# Altium PCB PCB_ECU_Standelone-V1.0_2024-03-04.pcbdoc (part 1 of 2)
Units mm, origin at the board's own origin, x right, y up, seen from the top; angles counter-clockwise.
Board outline 181.85 x 171.52 mm, 2 copper layers (Top Layer, Bottom Layer); 165 components, 147 nets, 580 pads, 706 vias.
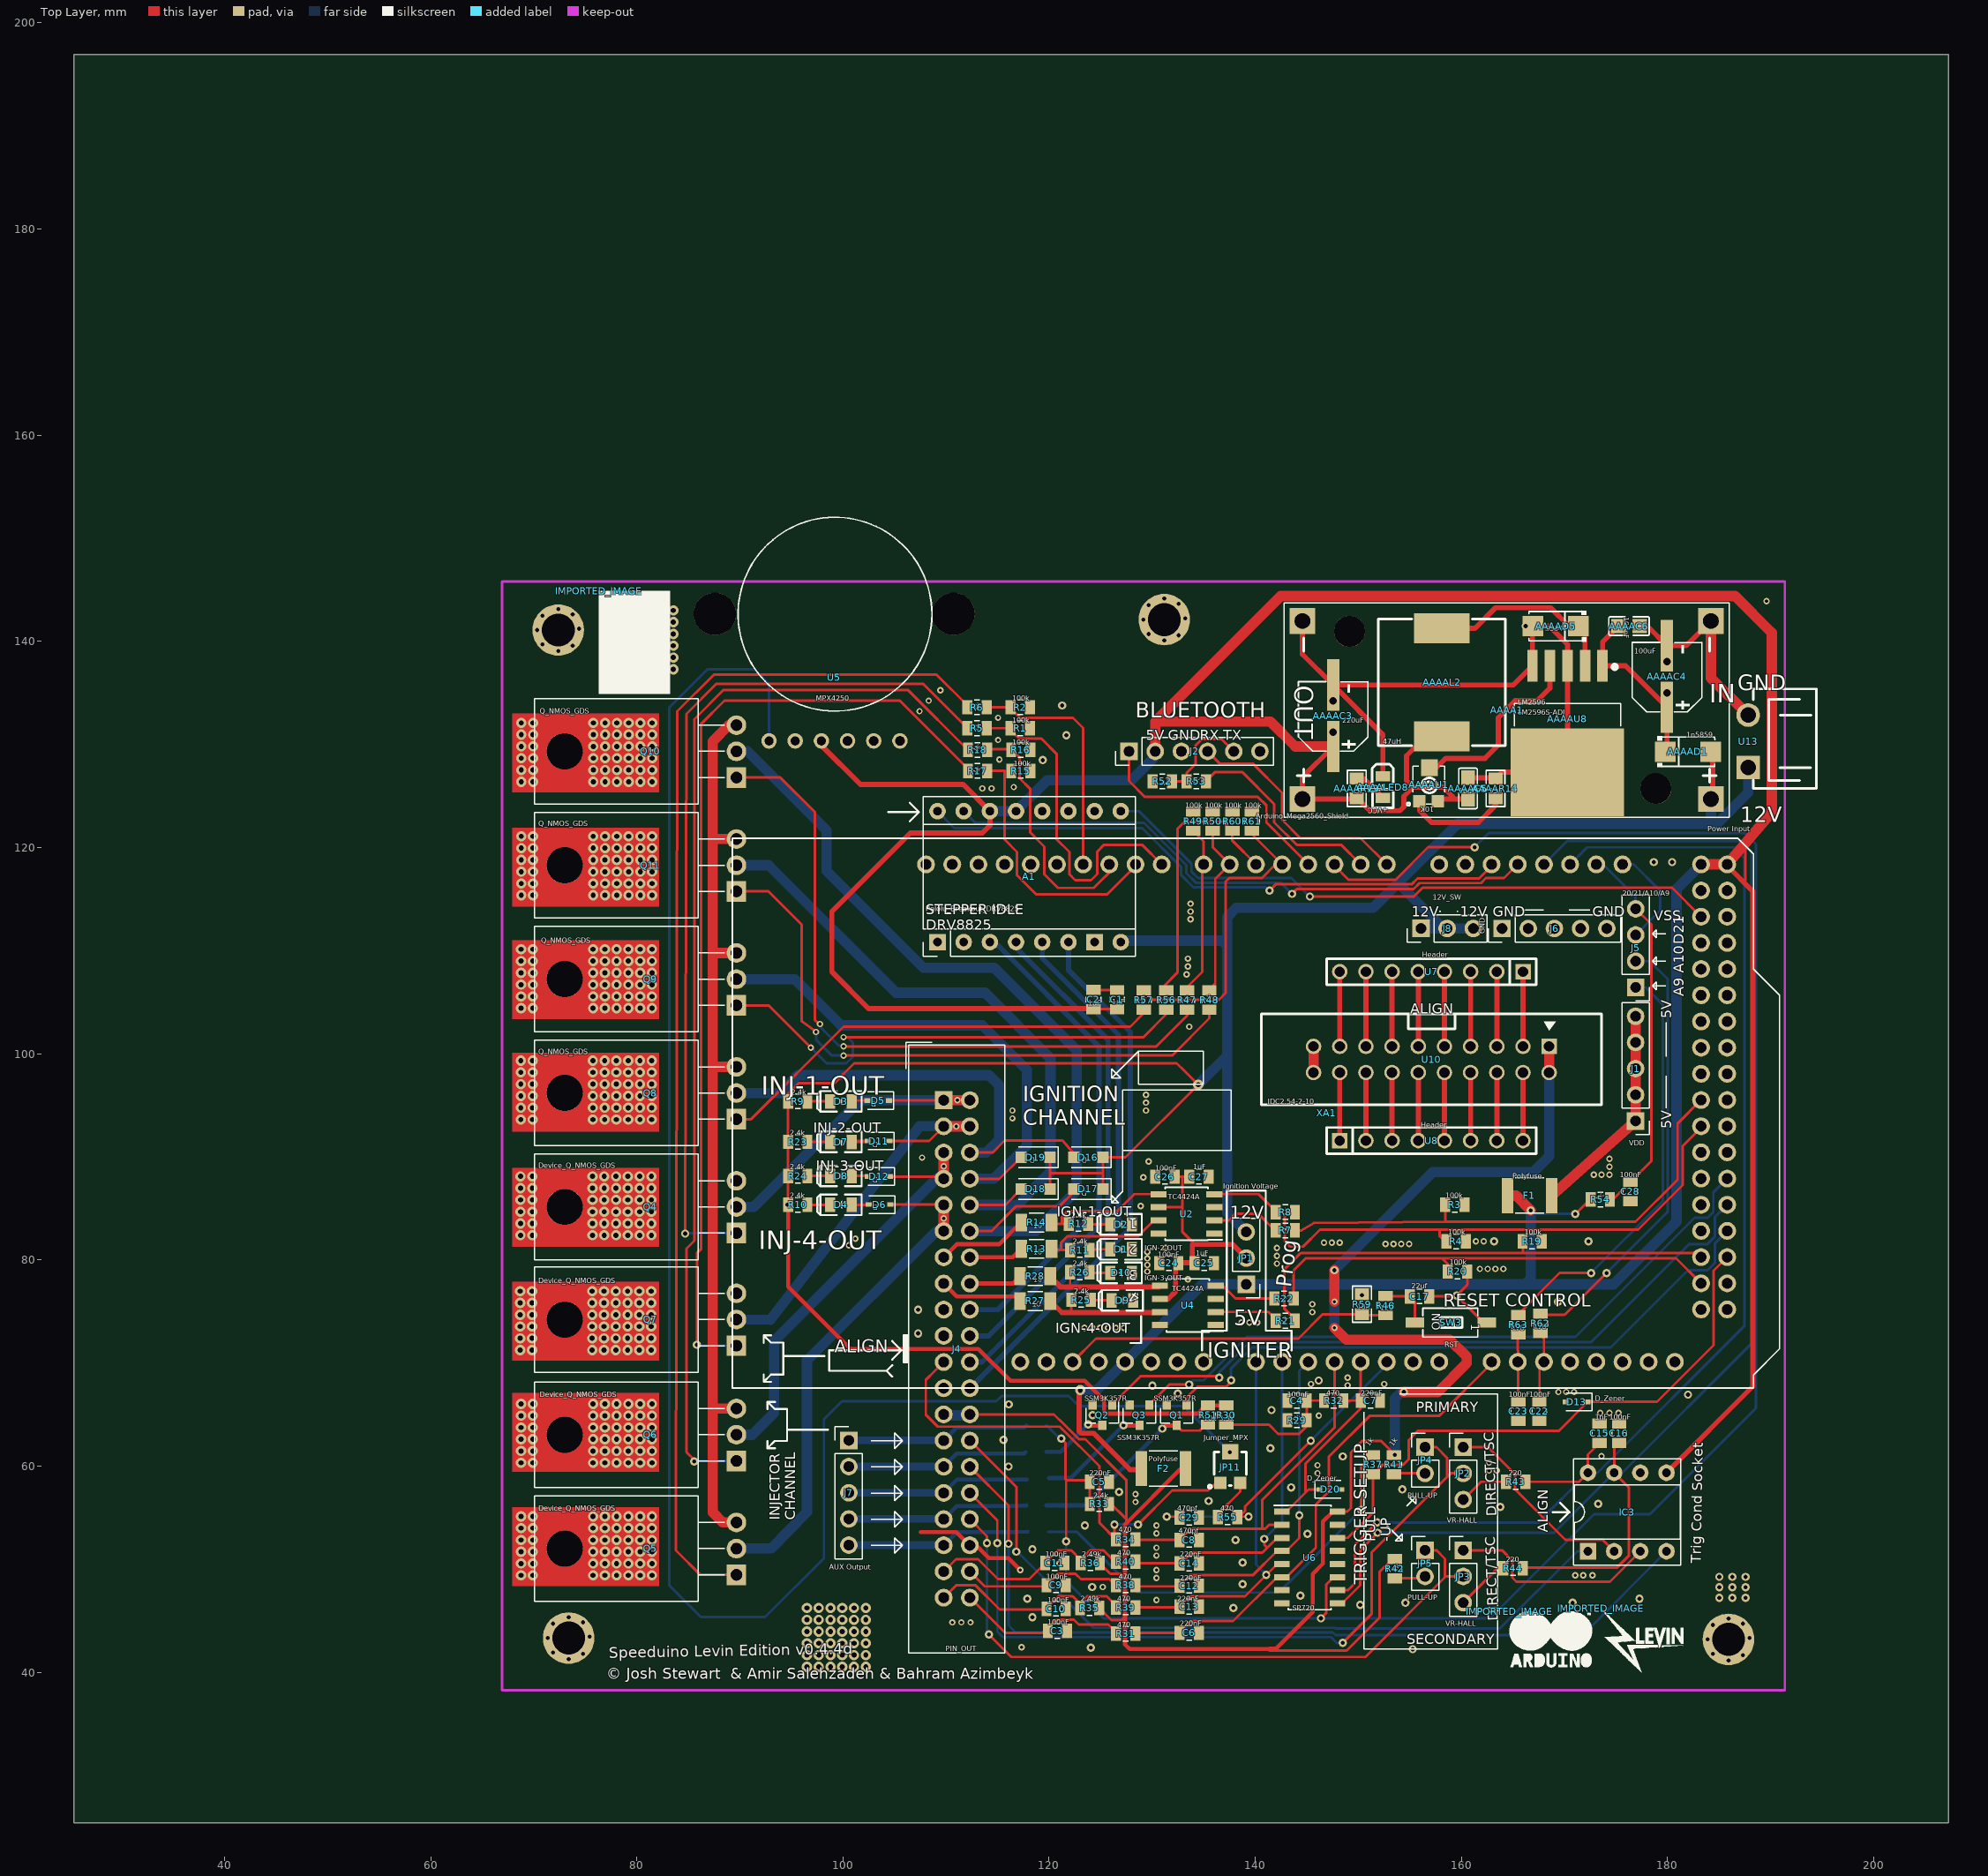
[diagram p0: Top Layer view]
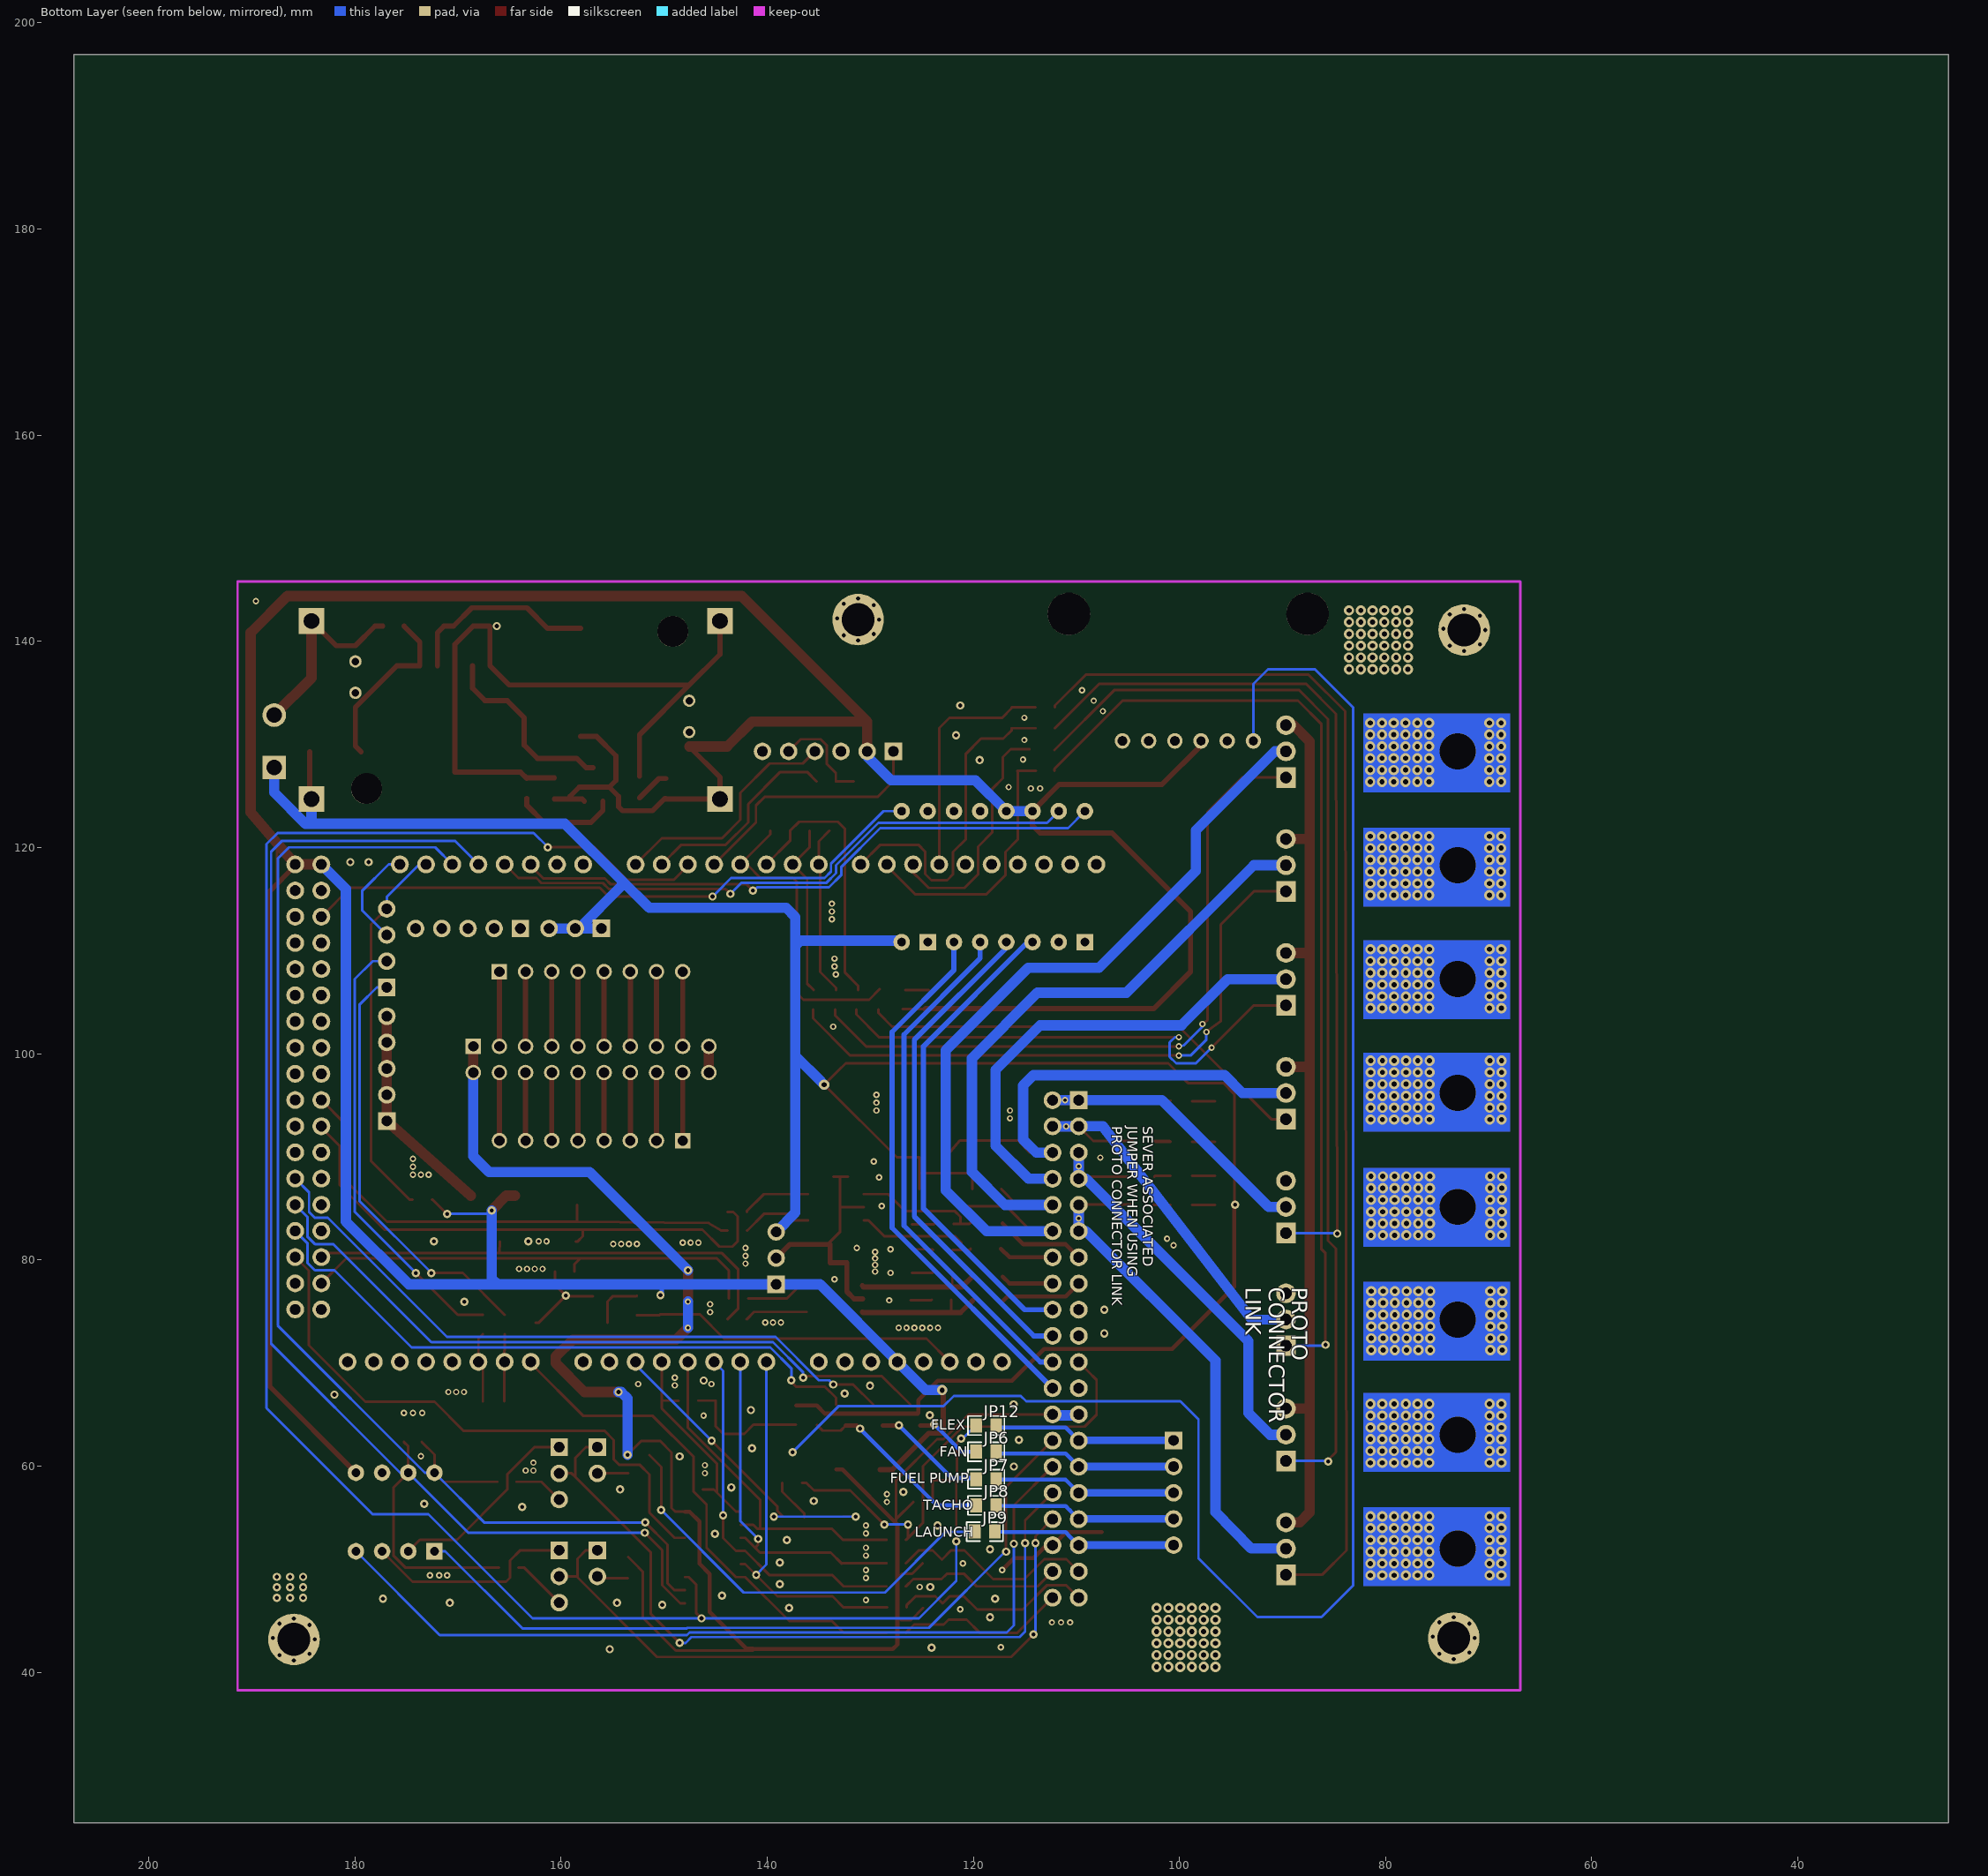
[diagram p1: Bottom Layer view, seen from below]

## Layer stack, top to bottom
Top Layer: signal copper (thickness not stored)
Dielectric: dielectric 0.32, FR-4, Dk 4.8
Bottom Layer: signal copper (thickness not stored)

## Board outline
207.251,25.4 25.4,25.4 25.4,196.925 207.251,196.925

## Components (designator, comment, footprint, x,y, rotation, side; value= is the part's Value field where it differs from the comment)
A1 "Pololu_Breakout_DRV8825" POLOLU_BREAKOUT-16_15.2X20.3MM -20.723,175.227 r0 top
AAAA1 "LM2596" DC-DC-STEP-DOWN-LM2596 164.58,132.969 r180 top
AAAAC3 "220uF" "CAP SMD 6.3 ~ 8 DIP 25V" 147.562,132.715 r90 top
AAAAC4 "100uF" "CAP SMD 6.3 ~ 8 DIP 25V" 179.947,136.525 r90 top
AAAAC5 "100nF" C0805 160.643,125.73 r270 top
AAAAC6 "100nF" C0805 176.264,141.478 r180 top
AAAAD1 "1n5859" SMA_L4.3-W2.6-LS5.1-RD 181.979,129.286 r0 top
AAAAD5 "SS34" SMA_L4.3-W2.6-LS5.1-RD 169.152,141.478 r180 top
AAAAL2 "47uH" IND-SMD_L12.3-W12.3_SMDRI127 158.103,136.017 r270 top
AAAALED8 "+VCC" LED0805-R-RD 152.386,125.858 r270 top
AAAAR13 "1K" R0805 149.848,125.73 r270 top
AAAAR14 "330" R0805 163.31,125.73 r270 top
AAAAU1 "10K" RES-ADJ-SMD_SMD33-10K 156.833,126.111 r0 top
AAAAU8 "LM2596S-ADJ" TO-263-5_L10.2-W8.9-P1.70-BR 170.295,132.461 r90 top
C1 "1nF" C_0805_2012METRIC 126.596,105.237 r270 top
C2 "1uF" C_0805_2012METRIC 124.311,105.238 r270 top
C3 "100nF" C_0805_2012METRIC 120.815,43.993 r0 top
C4 "100nF" C_0805_2012METRIC 144.056,66.345 r180 top
C5 "220nF" C_0805_2012METRIC 124.879,58.471 r0 top
C6 "220nF" C_0805_2012METRIC 133.591,43.815 r0 top
C7 "220nF" C_0805_2012METRIC 151.168,66.345 r0 top
C8 "470pf" C_0805_2012METRIC 133.592,52.832 r180 top
C9 "100nF" C_0805_2012METRIC 120.688,48.438 r0 top
C10 "100nF" C_0805_2012METRIC 120.688,46.152 r0 top
C11 "100nF" C_0805_2012METRIC 120.561,50.597 r0 top
C12 "220nF" C_0805_2012METRIC 133.591,48.387 r0 top
C13 "220nF" C_0805_2012METRIC 133.591,46.355 r0 top
C14 "220nF" C_0805_2012METRIC 133.591,50.546 r0 top
C15 "1nF" C_0805_2012METRIC 173.393,63.17 r270 top
C16 "100nF" C_0805_2012METRIC 175.298,63.17 r270 top
C17 "22uf" C_0805_2012METRIC 155.944,76.454 r180 top
C22 "100nF" C_0805_2012METRIC 167.551,65.329 r270 top
C23 "100nF" C_0805_2012METRIC 165.519,65.329 r270 top
C24 "100nF" C_0805_2012METRIC 131.61,79.68 r0 top
C25 "1uF" C_0805_2012METRIC 135.039,79.68 r180 top
C26 "100nF" C_0805_2012METRIC 131.229,88.062 r0 top
C27 "1uF" C_0805_2012METRIC 134.531,88.062 r180 top
C28 "100nF" C_0805_2012METRIC 176.39,86.614 r90 top
C29 "470pf" C_0805_2012METRIC 133.592,54.991 r0 top
D1 "IGN-2-OUT" LED0805_RED 126.989,81.025 r180 top
D2 "IGN-1-OUT" LED0805_RED 126.989,83.438 r180 top
D3 "INJ-1-OUT" LED0805_RED 99.811,95.376 r180 top
D4 "INJ-4-OUT" LED0805_RED 99.811,85.343 r180 top
D5 "D" D_SOD-323#1 -20.774,189.146 r0 top
D6 "D" D_SOD-323#2 -20.647,186.86 r0 top
D7 "INJ-2-OUT" LED0805_RED 99.811,91.439 r180 top
D8 "INJ-3-OUT" LED0805_RED 99.811,88.137 r180 top
D9 "IGN-4-OUT" LED0805_RED 127.116,76.072 r180 top
D10 "IGN-3-OUT" LED0805_RED 126.989,78.739 r180 top
D11 "D" D_SOD-323#3 -20.723,175.227 r0 top
D12 "D" D_SOD-323#4 -20.713,179.578 r0 top
D13 "D_Zener" D_SOD-323#5 -20.723,175.227 r0 top
D16 "D" D_SOD-123F#1 -20.459,169.545 r0 top
D17 "D" D_SOD-123F#2 -20.459,169.418 r0 top
D18 "D" D_SOD-123F#3 -20.713,169.418 r0 top
D19 "D" D_SOD-123F#4 -20.713,169.545 r0 top
D20 "D_Zener" D_SOD-323#6 -20.723,175.227 r0 top
F1 "Polyfuse" FUSE_1812_4532METRIC 166.612,86.233 r0 top
F2 "Polyfuse" FUSE_1812_4532METRIC 131.102,59.741 r0 top
IC3 "Trig Cond Socket" DIP-8_W7.62MM_SOCKET -20.723,175.227 r0 top
IMPORTED_IMAGE "IMPORTED_IMAGE" IMPORTED_IMAGE 76.322,144.902 r0 top
IMPORTED_IMAGE "IMPORTED_IMAGE" IMPORTED_IMAGE 164.678,45.891 r0 top
IMPORTED_IMAGE "IMPORTED_IMAGE" IMPORTED_IMAGE 173.536,46.2 r0 top
J1 "VDD" PINHEADER_1X05_P2.54MM_VERTICAL#1 138.291,77.216 r180 top
J2 "Conn_01x06" PINHEADER_1X06_P2.54MM_VERTICAL -20.723,175.227 r0 top
J4 "PIN_OUT" IDC-HEADER_2X20_P2.54MM_VERTICAL -20.724,175.227 r0 top
J5 "20/21/A10/A9" PINHEADER_1X04_P2.54MM_VERTICAL -21.348,175.133 r0 top
J6 "GND" PINHEADER_1X05_P2.54MM_VERTICAL#2 168.009,112.649 r90 top
J7 "AUX Output" PINHEADER_1X05_P2.54MM_VERTICAL#3 -20.84,175.26 r0 top
J8 "12V_SW" PINHEADER_1X03_P2.54MM_VERTICAL#1 -21.856,173.228 r0 top
JP1 "Ignition Voltage" PINHEADER_1X03_P2.54MM_VERTICAL#2 -20.723,175.227 r0 top
JP2 "VR-HALL" PINHEADER_1X03_P2.54MM_VERTICAL#3 -20.723,175.227 r0 top
JP3 "VR-HALL" PINHEADER_1X03_P2.54MM_VERTICAL#4 -20.723,175.227 r0 top
JP4 "PULL-UP" PINHEADER_1X02_P2.54MM_VERTICAL#1 -20.723,175.227 r0 top
JP5 "PULL-UP" PINHEADER_1X02_P2.54MM_VERTICAL#2 -20.723,175.227 r0 top
JP6 "FAN-OUT" "JUMPER 2X1 (PIN= 2.54) SMD(0805)" 118.733,61.468 r0 bottom
JP7 "FUELPUMP-OUT" "JUMPER 2X1 (PIN= 2.54) SMD(0805)" 118.733,58.801 r0 bottom
JP8 "TACHO-OUT" "JUMPER 2X1 (PIN= 2.54) SMD(0805)" 118.733,56.261 r0 bottom
JP9 "Clutch_in" "JUMPER 2X1 (PIN= 2.54) SMD(0805)" 118.86,53.721 r0 bottom
JP11 "Jumper_MPX" RES-ADJ-SMD_3P-10K-3-3 137.579,59.867 r0 top
JP12 "MCU-D2" "JUMPER 2X1 (PIN= 2.54) SMD(0805)" 118.733,64.008 r0 bottom
Q1 "SSM3K357R" SOT-23#1 -20.723,175.227 r0 top
Q2 "SSM3K357R" SOT-23#2 -20.723,175.227 r0 top
Q3 "SSM3K357R" SOT-23#3 -20.723,175.227 r0 top
Q4 "Device_Q_NMOS_GDS" TO-220_Q_NMOS_GDS 81.395,85.09 r90 top
Q5 "Device_Q_NMOS_GDS" TO-220_Q_NMOS_GDS 81.395,51.943 r90 top
Q6 "Device_Q_NMOS_GDS" TO-220_Q_NMOS_GDS 81.395,62.992 r90 top
Q7 "Device_Q_NMOS_GDS" TO-220_Q_NMOS_GDS 81.395,74.168 r90 top
Q8 "Q_NMOS_GDS" TO-220_Q_NMOS_GDS 81.395,96.139 r90 top
Q9 "Q_NMOS_GDS" TO-220_Q_NMOS_GDS 81.395,107.188 r90 top
Q10 "Q_NMOS_GDS" TO-220_Q_NMOS_GDS 81.395,129.286 r90 top
Q11 "Q_NMOS_GDS" TO-220_Q_NMOS_GDS 81.395,118.237 r90 top
R1 "100k" R_0805_2012METRIC 117.209,131.572 r0 top
R2 "100k" R_0805_2012METRIC 117.209,133.604 r180 top
R3 "100k" R_0805_2012METRIC 159.373,85.344 r0 top
R4 "100k" R_0805_2012METRIC 159.5,81.788 r180 top
R5 "1k" R_0805_2012METRIC 113.018,131.572 r0 top
R6 "1k" R_0805_2012METRIC 113.018,133.604 r0 top
R7 "1k" R_0805_2012METRIC 142.913,82.855 r0 top
R8 "1k" R_0805_2012METRIC 142.913,84.633 r0 top
R9 "2.4k" R_0805_2012METRIC 95.619,95.377 r180 top
R10 "2.4k" R_0805_2012METRIC 95.619,85.344 r180 top
R11 "2.4k" R_0805_2012METRIC 122.974,80.95 r0 top
R12 "2.4k" R_0805_2012METRIC 122.847,83.49 r0 top
R13 "10" R_1206_3216METRIC 118.784,81.077 r0 top
R14 "10" R_1206_3216METRIC 118.784,83.617 r0 top
R15 "100k" R_0805_2012METRIC 117.259,127.432 r0 top
R16 "100k" R_0805_2012METRIC 117.259,129.464 r180 top
R17 "1k" R_0805_2012METRIC 113.068,127.432 r0 top
R18 "1k" R_0805_2012METRIC 113.068,129.464 r0 top
R19 "100k" R_0805_2012METRIC 166.866,81.788 r0 top
R20 "100k" R_0805_2012METRIC 159.627,78.867 r180 top
R21 "1k" R_0805_2012METRIC 142.913,74.092 r0 top
R22 "1k" R_0805_2012METRIC 142.786,76.251 r0 top
R23 "2.4k" R_0805_2012METRIC 95.619,91.44 r180 top
R24 "2.4k" R_0805_2012METRIC 95.619,88.138 r180 top
R25 "2.4k" R_0805_2012METRIC 123.101,76.124 r0 top
R26 "2.4k" R_0805_2012METRIC 122.974,78.791 r0 top
R27 "10" R_1206_3216METRIC 118.657,75.997 r0 top
R28 "10" R_1206_3216METRIC 118.657,78.41 r0 top
R29 "1k" R_0805_2012METRIC 144.056,64.44 r0 top
R30 "3.9k" R_0805_2012METRIC 137.198,64.948 r90 top
R31 "470" R_0805_2012METRIC 127.42,43.739 r180 top
R32 "470" R_0805_2012METRIC 147.613,66.345 r180 top
R33 "2.4k" R_0805_2012METRIC 124.879,56.312 r180 top
R34 "470" R_0805_2012METRIC 127.42,52.883 r180 top
R35 "2.49k" R_0805_2012METRIC 123.94,46.228 r0 top
R36 "2.49k" R_0805_2012METRIC 123.99,50.597 r0 top
R37 "1k" R_0805_2012METRIC 151.422,60.122 r270 top
R38 "470" R_0805_2012METRIC 127.42,48.438 r180 top
R39 "470" R_0805_2012METRIC 127.42,46.279 r180 top
R40 "470" R_0805_2012METRIC 127.42,50.724 r180 top
R41 "1k" R_0805_2012METRIC 153.454,60.122 r90 top
R42 "1k" R_0805_2012METRIC 153.531,50.038 r90 top
R43 "220" R_0805_2012METRIC 165.266,58.471 r180 top
R44 "220" R_0805_2012METRIC 165.012,50.089 r180 top
R46 "120" R_0805_2012METRIC 152.642,75.566 r90 top
R47 "1k" R_0805_2012METRIC 133.388,105.207 r90 top
R48 "1k" R_0805_2012METRIC 135.547,105.207 r90 top
R49 "100k" R_0805_2012METRIC 133.973,122.555 r90 top
R50 "100k" R_0805_2012METRIC 135.878,122.555 r270 top
R51 "10k" R_0805_2012METRIC 135.42,64.948 r90 top
R52 "2k" R_0805_2012METRIC 130.975,126.416 r180 top
R53 "1k" R_0805_2012METRIC 134.277,126.416 r180 top
R54 "1k" R_0805_2012METRIC 173.47,85.852 r180 top
R55 "470" R_0805_2012METRIC 137.326,55.042 r180 top
R56 "1k" R_0805_2012METRIC 131.356,105.207 r90 top
R57 "1k" R_0805_2012METRIC 129.197,105.207 r90 top
R59 "10K" R0805 150.356,75.692 r270 top
R60 "100k" R_0805_2012METRIC 137.783,122.555 r90 top
R61 "100k" R_0805_2012METRIC 139.688,122.555 r270 top
R62 "470" R_0805_2012METRIC 167.679,73.838 r270 top
R63 "470" R_0805_2012METRIC 165.52,73.711 r90 top
SW3 "RST" SW-SMD_L5.4-W2.8-LS8.2 158.992,73.914 r90 top
U2 "TC4424A" SOIC-8_3.9X4.9MM_P1.27MM -20.713,183.769 r0 top
U4 "TC4424A" SOIC-8_3.9X4.9MM_P1.27MM -20.586,174.879 r0 top
U5 "MPX4250" MPX4250 98.794,141.859 r270 top
U6 "SP720" SOIC-16_3.9X9.9MM_P1.27MM -20.723,175.227 r0 top
U7 "Header" "1X8 HEADER (PIN = 2.54)" 157.087,107.95 r0 top
U8 "Header" "1X8 HEADER (PIN = 2.54)" 157.087,91.567 r180 top
U10 "IDC2.54-2-10" IDC-TH_20P-P2.54_ZX-IDC2.54-2-10PZZ 157.087,99.441 r180 top
U13 "Power Input" "PHONIX 2PIN (5.08MM)" 187.82,130.556 r90 top
XA1 "Arduino_Mega2560_Shield" ARDUINO_MEGA2560_SHIELD_IO_ONLY 146.927,94.234 r0 top
? "" ? 129.115,165.03 r0 top
? "" ? 52.534,92.011 r0 top

## Footprints (in the part's own frame and the unit in brackets; to place one, negate y for a bottom-side part, rotate by r counter-clockwise, add the part's x,y. Pads: shape width x height; smd on the part's side, far side on the other; paste and mask are expansions set on the pad)
"1X8 HEADER (PIN = 2.54)" [mm]
  rect 1.5x1.5 hole 1 paste+0 mask+0.102: 1(8.89,0)
  round 1.5 hole 1 paste+0 mask+0.102: 2(6.35,0) 3(3.81,0) 4(1.27,0) 5(-1.27,0) 6(-3.81,0) 7(-6.35,0) 8(-8.89,0)
  silkscreen extent -10.16,-1.27 10.16,1.27
ARDUINO_MEGA2560_SHIELD_IO_ONLY [mil]
  round 68 hole 40 slot 40.2 at 0 deg paste+0 mask+2: 3V3(-869.99,-950) 5V1(-769.99,-950) 5V3(1429.99,950) 5V4(1529.99,950) A0(-269.99,-950) A1(-169.99,-950) A2(-69.99,-950) A3(30.01,-950) A4(130.01,-950) A5(230.01,-950) A6(329.99,-950) A7(429.99,-950) A8(629.99,-950) A9(729.99,-950) A10(829.99,-950) A11(929.99,-950) A12(1029.99,-950) A13(1129.99,-950) A14(1229.99,-950) A15(1329.99,-950) AREF(-1329.99,950) D0(230.01,950) D1(130.01,950) D2(30.01,950) D3(-69.99,950) D4(-169.99,950) D5(-269.99,950) D6(-369.99,950) D7(-469.99,950) D8(-629.99,950) D9(-729.99,950) D10(-829.99,950) D11(-929.99,950) D12(-1029.99,950) D13(-1129.99,950) D14(429.99,950) D15(529.99,950) D16(629.99,950) D17(729.99,950) D18(829.99,950) D19(929.99,950) D20(1029.99,950) D21(1129.99,950) D22(1429.99,850) D23(1529.99,850) D24(1429.99,750) D25(1529.99,750) D26(1429.99,650) D27(1529.99,650) D28(1429.99,550) D29(1529.99,550) D30(1429.99,450) D31(1529.99,450) D32(1429.99,350) D33(1529.99,350) D34(1429.99,250) D35(1529.99,250) D36(1429.99,150) D37(1529.99,150) D38(1429.99,50) D39(1529.99,50) D40(1429.99,-50) D41(1529.99,-50) D42(1429.99,-150) D43(1529.99,-150) D44(1429.99,-250) D45(1529.99,-250) D46(1429.99,-350) D47(1529.99,-350) D48(1429.99,-450) D49(1529.99,-450) D50(1429.99,-550) D51(1529.99,-550) D52(1429.99,-650) D53(1529.99,-650) GND1(-1229.99,950) GND2(-669.99,-950) GND3(-569.99,-950) GND5(1429.99,-750) GND6(1529.99,-750) IORF(-1069.99,-950) RST1(-969.99,-950) SCL(-1529.99,950) SDA(-1429.99,950) VIN(-469.99,-950) ""(-1169.99,-950)
  silkscreen extent -2270,-1050 1730,1050
C0805 [mm]
  rect 1.41x1.35 smd paste-100 mask+0.051: 1(-1.03,0) 2(1.03,0)
  silkscreen extent -1.96,-0.9 1.96,0.9
C_0805_2012METRIC [mm]
  rect 0.975x1.398 smd paste+0 mask+0.051: 1(-0.938,0) 2(0.938,0)
  silkscreen extent -0.26,-0.71 0.26,0.71
"CAP SMD 6.3 ~ 8 DIP 25V" [mm]
  rect 5x1.2 smd paste+0 mask+0.051: 1(-2.921,0) 2(3.048,0)
  round 1.2 hole 0.721 paste+0 mask+0.051: 1(-1.524,0) 2(1.524,0)
  silkscreen extent -3.38,-3.38 3.38,3.38
D_SOD-123F#1 [mm]
  rect 1.1x1.1 smd paste+0 mask+0.051: 1(145.675,-79.6) 2(142.875,-79.6)
  silkscreen extent 142.62,-80.6 146.47,-78.6
D_SOD-123F#2 [mm]
  rect 1.1x1.1 smd paste+0 mask+0.051: 1(145.675,-82.55) 2(142.875,-82.55)
  silkscreen extent 142.62,-83.55 146.47,-81.55
D_SOD-123F#3 [mm]
  rect 1.1x1.1 smd paste+0 mask+0.051: 1(140.8,-82.55) 2(138,-82.55)
  silkscreen extent 137.75,-83.55 141.6,-81.55
D_SOD-123F#4 [mm]
  rect 1.1x1.1 smd paste+0 mask+0.051: 1(140.8,-79.6) 2(138,-79.6)
  silkscreen extent 137.75,-80.6 141.6,-78.6
D_SOD-323#1 [mm]
  rect 0.6x0.45 smd paste+0 mask+0.051: 1(125.25,-93.7) 2(123.15,-93.7)
  silkscreen extent 123.15,-94.55 125.7,-92.85
D_SOD-323#2 [mm]
  rect 0.6x0.45 smd paste+0 mask+0.051: 1(125.25,-101.5) 2(123.15,-101.5)
  silkscreen extent 123.15,-102.35 125.7,-100.65
D_SOD-323#3 [mm]
  rect 0.6x0.45 smd paste+0 mask+0.051: 1(125.25,-83.7) 2(123.15,-83.7)
  silkscreen extent 123.15,-84.55 125.7,-82.85
D_SOD-323#4 [mm]
  rect 0.6x0.45 smd paste+0 mask+0.051: 1(125.25,-91.5) 2(123.15,-91.5)
  silkscreen extent 123.15,-92.35 125.7,-90.65
D_SOD-323#5 [mm]
  rect 0.6x0.45 smd paste+0 mask+0.051: 1(192.95,-109) 2(190.85,-109)
  silkscreen extent 190.85,-109.85 193.4,-108.15
D_SOD-323#6 [mm]
  rect 0.6x0.45 smd paste+0 mask+0.051: 1(166.95,-117.5) 2(169.05,-117.5)
  silkscreen extent 166.5,-118.35 169.05,-116.65
DC-DC-STEP-DOWN-LM2596 [mm]
  rect 2.5x2.5 hole 1.5 paste+0 mask+0.051: IN+(-19.624,8.272) IN-(-19.624,-9) OUT+(20,8.272) OUT-(20,-9)
  round 3 hole 3 unplated paste+0: ""(-14.29,7.256) ""(15.428,-7.984)
  silkscreen extent -21.4,-10.78 21.78,10.05
DIP-8_W7.62MM_SOCKET [mil]
  rect 62.99x62.99 hole 31.5 slot 31.7 at 90 deg paste+0 mask+2: 1(7598.41,-4862.19)
  round 62.99 hole 31.5 slot 31.7 at 90 deg paste+0 mask+2: 2(7698.41,-4862.19) 3(7798.41,-4862.19) 4(7898.41,-4862.19) 5(7898.41,-4562.2) 6(7798.41,-4562.2) 7(7698.41,-4562.2) 8(7598.41,-4562.2)
  silkscreen extent 7544,-4915 7953,-4510
FUSE_1812_4532METRIC [mm]
  rect 1.125x3.398 smd paste+0 mask+0.051: 1(-2.138,0) 2(2.138,0)
  silkscreen extent -1.39,-1.71 1.39,1.71
IDC-HEADER_2X20_P2.54MM_VERTICAL [mil]
  rect 68x68 hole 40 slot 40.2 at 0 deg paste+0 mask+2: 1(5137.79,-3139.36)
  round 68 hole 40 slot 40.2 at 0 deg paste+0 mask+2: 2(5237.78,-3139.36) 3(5137.79,-3239.36) 4(5237.78,-3239.36) 5(5137.79,-3339.36) 6(5237.78,-3339.36) 7(5137.79,-3439.36) 8(5237.78,-3439.36) 9(5137.79,-3539.36) 10(5237.78,-3539.36) 11(5137.79,-3639.36) 12(5237.78,-3639.36) 13(5137.79,-3739.36) 14(5237.78,-3739.36) 15(5137.79,-3839.36) 16(5237.78,-3839.36) 17(5137.79,-3939.36) 18(5237.78,-3939.36) 19(5137.79,-4039.36) 20(5237.78,-4039.36) 21(5137.79,-4139.36) 22(5237.78,-4139.36) 23(5137.79,-4239.36) 24(5237.78,-4239.36) 25(5137.79,-4339.36) 26(5237.78,-4339.36) 27(5137.79,-4439.36) 28(5237.78,-4439.36) 29(5137.79,-4539.36) 30(5237.78,-4539.36) 31(5137.79,-4639.36) 32(5237.78,-4639.36) 33(5137.79,-4739.36) 34(5237.78,-4739.36) 35(5137.79,-4839.36) 36(5237.78,-4839.36) 37(5137.79,-4939.36) 38(5237.78,-4939.36) 39(5137.79,-5039.36) 40(5237.78,-5039.36)
  silkscreen extent 4994,-5250 5372,-2919
IDC-TH_20P-P2.54_ZX-IDC2.54-2-10PZZ [mm]
  rect 1.5x1.5 hole 1.02 paste+0 mask+0.051: 1(-11.43,-1.27)
  round 1.5 hole 1.02 paste+0 mask+0.051: 2(-11.43,1.27) 3(-8.89,-1.27) 4(-8.89,1.27) 5(-6.35,-1.27) 6(-6.35,1.27) 7(-3.81,-1.27) 8(-3.81,1.27) 9(-1.27,-1.27) 10(-1.27,1.27) 11(1.27,-1.27) 12(1.27,1.27) 13(3.81,-1.27) 14(3.81,1.27) 15(6.35,-1.27) 16(6.35,1.27) 17(8.89,-1.27) 18(8.89,1.27) 19(11.43,-1.27) 20(11.43,1.27)
  silkscreen extent -16.5,-4.4 16.5,4.4
IMPORTED_IMAGE [mm]
  silkscreen extent 0,-10 6.9,0
IND-SMD_L12.3-W12.3_SMDRI127 [mm]
  rect 2.9x5.4 smd paste+0 mask+0.051: 1(-5.25,0) 2(5.25,0)
  silkscreen extent -6.15,-6.15 6.15,6.15
"JUMPER 2X1 (PIN= 2.54) SMD(0805)" [mm]
  rect 1.133x1.377 smd paste-100 mask+0.051: 1(0.99,0.083) 2(-0.942,0.083)
  silkscreen extent -1.74,-0.83 1.78,1
LED0805-R-RD [mm]
  rect 1x1.4 smd paste+0 mask+0.051: 1(1.05,0) 2(-1.05,0)
  silkscreen extent -2.22,-1.04 1.99,1.01
LED0805_RED [mm]
  rect 1x1.4 smd paste+0 mask+0.051: 1(-1.05,0) 2(1.05,0)
  silkscreen extent -2,-1 2.3,1
MPX4250 [mil]
  round 59.05 hole 33.08 slot 33.09 at 90 deg paste+0 mask+2: 1(453.53,-234.72) 2(453.53,-134.72) 3(453.53,-34.72)
  round 59.05 hole 35.4 slot 35.6 at 90 deg paste+0 mask+2: 4(453.53,65.28) 5(453.53,165.28) 6(453.53,265.28)
  round 161.42 hole 161.42 slot 161.62 at 90 deg paste+0 mask+2: ""(-31.51,470) ""(-31.51,-441.41)
  silkscreen extent -401,-353 340,387
"PHONIX 2PIN (5.08MM)" [mm]
  rect 2.3x2.3 hole 1.5 paste+0 mask+0.051: 1(-2.794,0)
  round 2.3 hole 1.5 paste+0 mask+0.051: 2(2.286,0)
  silkscreen extent -4.83,-6.6 4.83,-0.51
PINHEADER_1X02_P2.54MM_VERTICAL#1 [mm]
  rect 1.7x1.7 hole 1 paste+0 mask+0.051: 1(177.2,-113.4)
  round 1.7 hole 1 paste+0 mask+0.051: 2(177.2,-115.94)
  silkscreen extent 175.87,-117.27 178.53,-112.07
PINHEADER_1X02_P2.54MM_VERTICAL#2 [mm]
  rect 1.7x1.7 hole 1 paste+0 mask+0.051: 1(177.2,-123.4)
  round 1.7 hole 1 paste+0 mask+0.051: 2(177.2,-125.94)
  silkscreen extent 175.87,-127.27 178.53,-122.07
PINHEADER_1X03_P2.54MM_VERTICAL#1 [mm]
  rect 1.7x1.7 hole 1 paste+0 mask+0.051: 1(177.935,-61.08)
  round 1.7 hole 1 paste+0 mask+0.051: 2(180.475,-61.08) 3(183.015,-61.08)
  silkscreen extent 176.6,-62.41 184.34,-59.75
PINHEADER_1X03_P2.54MM_VERTICAL#2 [mm]
  rect 1.7x1.7 hole 1 paste+0 mask+0.051: 1(159.85,-97.6)
  round 1.7 hole 1 paste+0 mask+0.051: 2(159.85,-95.06) 3(159.85,-92.52)
  silkscreen extent 158.52,-98.93 161.18,-91.19
PINHEADER_1X03_P2.54MM_VERTICAL#3 [mm]
  rect 1.7x1.7 hole 1 paste+0 mask+0.051: 1(180.9,-113.4)
  round 1.7 hole 1 paste+0 mask+0.051: 2(180.9,-115.94) 3(180.9,-118.48)
  silkscreen extent 179.57,-119.81 182.23,-112.07
PINHEADER_1X03_P2.54MM_VERTICAL#4 [mm]
  rect 1.7x1.7 hole 1 paste+0 mask+0.051: 1(180.9,-123.4)
  round 1.7 hole 1 paste+0 mask+0.051: 2(180.9,-125.94) 3(180.9,-128.48)
  silkscreen extent 179.57,-129.81 182.23,-122.07
PINHEADER_1X04_P2.54MM_VERTICAL [mm]
  rect 1.7x1.7 hole 1 paste+0 mask+0.051: 1(198.255,-68.7)
  round 1.7 hole 1 paste+0 mask+0.051: 2(198.255,-66.16) 3(198.255,-63.62) 4(198.255,-61.08)
  silkscreen extent 196.92,-70.03 199.58,-59.75
PINHEADER_1X05_P2.54MM_VERTICAL#1 [mm]
  rect 1.7x1.7 hole 1 paste+0 mask+0.051: 1(-38.608,-16.256)
  round 1.7 hole 1 paste+0 mask+0.051: 2(-38.608,-18.796) 3(-38.608,-21.336) 4(-38.608,-23.876) 5(-38.608,-26.416)
  silkscreen extent -39.94,-27.75 -37.28,-14.93
PINHEADER_1X05_P2.54MM_VERTICAL#2 [mm]
  rect 1.7x1.7 hole 1 paste+0 mask+0.051: 1(-0.508,4.064)
  round 1.7 hole 1 paste+0 mask+0.051: 2(-0.508,1.524) 3(-0.508,-1.016) 4(-0.508,-3.556) 5(-0.508,-6.096)
  silkscreen extent -1.84,-7.43 0.82,5.39
PINHEADER_1X05_P2.54MM_VERTICAL#3 [mm]
  rect 1.7x1.7 hole 1 paste+0 mask+0.051: 1(121.412,-112.776)
  round 1.7 hole 1 paste+0 mask+0.051: 2(121.412,-115.316) 3(121.412,-117.856) 4(121.412,-120.396) 5(121.412,-122.936)
  silkscreen extent 120.08,-124.27 122.74,-111.45
PINHEADER_1X06_P2.54MM_VERTICAL [mm]
  rect 1.7x1.7 hole 1 paste+0 mask+0.051: 1(148.48,-45.9)
  round 1.7 hole 1 paste+0 mask+0.051: 2(151.02,-45.9) 3(153.56,-45.9) 4(156.1,-45.9) 5(158.64,-45.9) 6(161.18,-45.9)
  silkscreen extent 147.15,-47.23 162.51,-44.57
POLOLU_BREAKOUT-16_15.2X20.3MM [mil]
  rect 62.99x62.99 hole 31.5 slot 31.7 at 90 deg paste+0 mask+2: 1(5114.16,-2535.43) 7(5714.16,-2535.43)
  round 62.99 hole 31.5 slot 31.7 at 90 deg paste+0 mask+2: 2(5214.16,-2535.43) 3(5314.16,-2535.43) 4(5414.16,-2535.43) 5(5514.16,-2535.43) 6(5614.16,-2535.43) 8(5814.16,-2535.43) 9(5814.16,-2035.43) 10(5714.16,-2035.43) 11(5614.16,-2035.43) 12(5514.16,-2035.43) 13(5414.16,-2035.43) 14(5314.16,-2035.43) 15(5214.16,-2035.43) 16(5114.16,-2035.43)
  silkscreen extent 5059,-2591 5869,-1980
R0805 [mm]
  rect 1.133x1.377 smd paste-100 mask+0.051: 1(-0.966,0) 2(0.966,0)
  silkscreen extent -1.76,-0.92 1.76,0.92
R_0805_2012METRIC [mm]
  rect 0.975x1.398 smd paste+0 mask+0.051: 1(-0.938,0) 2(0.938,0)
  silkscreen extent -0.26,-0.71 0.26,0.71
R_1206_3216METRIC [mm]
  rect 1.125x1.748 smd paste+0 mask+0.051: 1(-1.463,0) 2(1.463,0)
  silkscreen extent -0.73,-0.91 0.73,0.91
RES-ADJ-SMD_3P-10K-3-3 [mm]
  rect 1.2x1.2 smd paste+0 mask+0.051: 1(-0.95,-1.494) 3(0.95,-1.494)
  rect 1.6x1.5 smd paste+0 mask+0.051: 2(0,1.494)
  silkscreen extent -2.14,-2.03 1.55,1.5
RES-ADJ-SMD_SMD33-10K [mm]
  rect 1.2x1.2 smd paste+0 mask+0.051: 1(-0.9,-1.625) 3(0.9,-1.625)
  rect 1.6x1.6 smd paste+0 mask+0.051: 2(0.064,1.625)
  silkscreen extent -2.11,-2.05 1.52,1.78
SMA_L4.3-W2.6-LS5.1-RD [mm]
  rect 2x2 smd paste+0 mask+0.051: 1(-2.2,0) 2(2.2,0)
  silkscreen extent -2.98,-1.5 2.6,1.5
SOIC-8_3.9X4.9MM_P1.27MM [mm]
  rect 1.55x0.6 smd paste+0 mask+0.051: 1(156.75,-101.205) 2(156.75,-99.935) 3(156.75,-98.665) 4(156.75,-97.395) 5(151.35,-97.395) 6(151.35,-98.665) 7(151.35,-99.935) 8(151.35,-101.205)
  silkscreen extent 151.97,-101.87 157.52,-96.72
SOIC-16_3.9X9.9MM_P1.27MM [mm]
  rect 1.5x0.6 smd paste+0 mask+0.051: 1(163.3,-119.655) 2(163.3,-120.925) 3(163.3,-122.195) 4(163.3,-123.465) 5(163.3,-124.735) 6(163.3,-126.005) 7(163.3,-127.275) 8(163.3,-128.545) 9(168.7,-128.545) 10(168.7,-127.275) 11(168.7,-126.005) 12(168.7,-124.735) 13(168.7,-123.465) 14(168.7,-122.195) 15(168.7,-120.925) 16(168.7,-119.655)
  silkscreen extent 162.55,-129.17 168.07,-119.02
SOT-23#1 [mil]
  rect 31.5x35.43 smd paste+0 mask+2: 1(6064.95,-4303.14) 2(5990.15,-4303.14) 3(6027.55,-4381.88)
  silkscreen extent 5965,-4372 6090,-4287
SOT-23#2 [mil]
  rect 31.5x35.43 smd paste+0 mask+2: 1(5781.48,-4303.14) 2(5706.68,-4303.14) 3(5744.08,-4381.88)
  silkscreen extent 5682,-4372 5806,-4287
SOT-23#3 [mil]
  rect 31.5x35.43 smd paste+0 mask+2: 1(5923.22,-4303.14) 2(5848.41,-4303.14) 3(5885.82,-4381.88)
  silkscreen extent 5824,-4372 5948,-4287
SW-SMD_L5.4-W2.8-LS8.2 [mm]
  rect 1x1.8 smd paste+0 mask+0.05: 1(0,-3.492) 2(0,3.492)
  silkscreen extent -1.4,-2.6 1.4,2.73
TO-220_Q_NMOS_GDS [mm]
  rect 2x1.905 hole 1.1 slot 1.1 at 0 deg paste+0 mask+0.051: 1(-2.497,-8.275)
  round 1.905 hole 1.1 slot 1.1 at 0 deg paste+0 mask+0.051: 2(0.043,-8.275) 3(2.583,-8.275)
  round 3.5 hole 3.5 unplated paste+0: ""(0.043,8.385)
  silkscreen extent -5.08,-7.12 5.16,11.31
TO-263-5_L10.2-W8.9-P1.70-BR [mm]
  rect 3.083x1.02 smd paste+0 mask+0.051: 1(5.16,-3.4) 2(5.16,-1.7) 3(5.16,0) 4(5.16,1.7) 5(5.16,3.4)
  rect 8.5x11 smd paste+0 mask+0.051: 6(-5.16,0)
  silkscreen extent -0.66,-5.16 5.26,5.16
? [mm]

## Free pads (board coordinates)
  round 5 hole 3.2 paste+0 mask+0.051: 1(72.377,141.097) 1(73.393,43.307) 1(131.178,142.113) 1(185.915,43.18)

## Via types
v1: diameter 1, hole 0.5, Top Layer to Bottom Layer, tented both sides, 458 vias
v2: diameter 0.8, hole 0.4, Top Layer to Bottom Layer, tented both sides, 130 vias
v3: diameter 0.62, hole 0.31, Top Layer to Bottom Layer, tented both sides, 118 vias

## Nets (pads, with @x,y where several pads share a name; then routed paths per layer and width w, separated by ;. In a path a pad name is that pad's centre, name@x,y a point inside that pad or via, vN(x,y) a via of type N, cw(c..) or ccw(c..) an arc to the next point about the centre after c; other vN are vias at no path point)
12V-SW: A1.8 AAAA1.IN+ AAAAD1.2 D16.1 D17.1 D18.1 D19.1 J8.1 J8.2 J8.3 JP1.3 R9.2 R10.2 R23.2 R24.2 R30.2 R51.2 U13.1 | length 254.8
  Top Layer w0.254: R10.2@94.681,85.344 R24.2@94.681,88.138 R23.2@94.681,91.44 R9.2@94.681,95.377 94.681,96.09 95.746,97.155 99.175,97.155 101.08,99.06 132.378,99.06 133.084,98.382 v1(134.471,96.995) 127.421,89.945 D16.1@125.215,89.945 D17.1@125.215,86.868 ; D18.1@120.086,86.868 D19.1@120.086,89.945 ; 120.086,88.415 125.215,88.415
  Top Layer w0.4: R10.2@94.681,85.344 94.681,77.392 100.709,71.363 113.14,71.363 116.243,68.261 123.462,68.261 125.327,66.397 125.327,65.157 125.407,65.077 134.389,65.077 135.176,65.864 R30.2@137.176,65.864
  Top Layer w0.5: AAAA1.IN+@184.204,124.697 184.392,124.885 AAAAD1.2@184.392,129.286
  Bottom Layer w1: A1.8@126.957,110.827 127.094,110.965 132.693,110.965 136.757,110.965 137.265,110.457 137.265,99.939 ; v1(134.471,96.995) 134.97,97.495 137.011,99.535 137.265,99.535 ; 137.265,99.715 137.265,84.569 JP1.3@139.126,82.707 ; 137.265,110.711 137.265,113.251 138.154,114.14 151.455,114.14 154.075,116.76 154.075,116.333 158.26,112.148 J8.3@161.158,112.148 ; 154.074,116.761 159.614,122.301 184.772,122.301 187.821,125.349 U13.1@187.82,127.762 ; J8.1@156.078,112.148 J8.2@158.618,112.148 ; 184.157,122.301 184.203,122.348 AAAA1.IN+@184.204,124.697
  other v2: 94.603,85.344
AAAAD5_1: AAAAD5.1 AAAAL2.1 AAAAU8.2 | length 18.9
  Top Layer w0.5: AAAAL2.1@158.103,141.267 161.32,141.267 163.309,143.256 168.643,143.256 170.421,141.478 AAAAD5.1@171.353,141.478 ; AAAAD5.1@171.352,141.478 171.995,140.835 AAAAU8.2@171.994,137.621
AAAALED8_1: AAAALED8.1 AAAAR13.1 | length 3.3
  Top Layer w0.5: AAAAR13.1@149.848,126.696 150.498,126.696 AAAALED8.1@152.388,124.807
AAAAR14_2: AAAAR14.2 AAAAU1.1 | length 10.1
  Top Layer w0.5: AAAAU1.1@155.933,124.486 155.933,123.581 157.087,122.428 161.659,122.428 163.31,124.079 AAAAR14.2@163.31,124.764
AAAAU1_2: AAAAU1.2 AAAAU8.4 | length 18.6
  Top Layer w0.5: AAAAU1.2@156.896,127.736 157.569,127.736 158.484,128.651 162.294,128.651 163.564,129.921 163.564,132.588 165.215,134.239 167.374,134.239 168.595,135.46 AAAAU8.4@168.595,137.621
BOOST: 
  other v1: 68.8,126.376 69.943,126.376 75.785,126.376 76.928,126.376 78.071,126.376 79.214,126.376 80.357,126.376 81.5,126.376 68.8,127.519 69.943,127.519 75.785,127.519 76.928,127.519 78.071,127.519 79.214,127.519 80.357,127.519 81.5,127.519 68.8,128.662 69.943,128.662 75.785,128.662 76.928,128.662 78.071,128.662 79.214,128.662 80.357,128.662 81.5,128.662 68.8,129.805 69.943,129.805 75.785,129.805 76.928,129.805 78.071,129.805 79.214,129.805 80.357,129.805 81.5,129.805 68.8,130.948 69.943,130.948 75.785,130.948 76.928,130.948 78.071,130.948 79.214,130.948 80.357,130.948 81.5,130.948 68.8,132.091 69.943,132.091 75.785,132.091 76.928,132.091 78.071,132.091 79.214,132.091 80.357,132.091 81.5,132.091
BOOST-OUT: D17.2 J4.12 Q10.2 | length 84.8
  Top Layer w0.254: J4.12@112.316,82.787 114.397,82.786 116.828,85.217 121.019,85.217 122.416,86.614 D17.2@122.415,86.868
  Bottom Layer w1: Q10.2@89.67,129.329 90.749,129.329 98.413,121.666 98.413,117.729 107.811,108.331 114.669,108.331 122.67,100.33 122.67,86.741 118.715,82.786 J4.12@112.316,82.787
CAM-IN: J4.34 JP3.2 JP5.1 | length 66.2
  Top Layer w0.25: J4.34@112.316,54.847 113.977,53.187 v2(113.977,52.527) ; v2(114.151,43.655) 114.551,43.255 116.329,41.477 150.692,41.477 158.409,49.194 ; JP5.1@156.476,51.827 157.576,51.827 158.409,50.994 158.409,49.194 ; JP3.2@160.176,49.287 158.502,49.287 158.409,49.194
  Bottom Layer w0.25: v2(113.977,52.527) 113.977,43.829 v2(114.151,43.655)
CLT_SENSOR: C11.1 J4.37 R36.1 R40.2 | length 20.5
  Top Layer w0.25: J4.37@109.776,49.767 110.965,50.955 113.117,50.955 115.05,49.022 118.072,49.022 120.866,51.816 122.162,51.816 123.051,50.927 123.94,51.816 125.301,51.816 R40.2@126.538,50.576
CLUTCH_IN: JP9.1 R37.1 | length 41.9
  Top Layer w0.25: v2(150.277,55.727) 150.276,59.913 R37.1@151.422,61.059
  Bottom Layer w0.25: JP9.1@119.926,53.627 122.677,53.627 128.578,47.727 142.276,47.727 v2(150.277,55.727)
CRANK-IN: J4.32 JP2.2 JP4.1 | length 75
  Top Layer w0.25: J4.32@112.316,57.387 114.977,54.727 v2(114.977,52.527) ; v2(148.476,42.834) 148.876,43.234 151.277,45.634 151.277,51.589 158.596,58.908 ; JP4.1@156.476,61.827 157.576,61.827 158.596,60.808 158.596,58.908 ; JP2.2@160.176,59.287 158.974,59.287 158.596,58.908
  Bottom Layer w0.25: v2(114.977,52.527) 114.977,43.927 115.503,43.401 147.344,43.401 147.911,42.834 v2(148.476,42.834)
D1_2: D1.2 R11.2 | length 2.1
  Top Layer w0.254: R11.2@123.912,80.95 123.988,81.026 D1.2@125.938,81.025
D2_2: D2.2 R12.2 | length 2.2
  Top Layer w0.254: R12.2@123.785,83.49 123.836,83.439 D2.2@125.938,83.438
D3_1: D3.1 D5.2 | length 1.5
  Top Layer w0.25: D3.1@100.863,95.446 D5.2@102.376,95.446
D4_1: D4.1 D6.2 | length 1.6
  Top Layer w0.254: D4.1@100.861,85.343 102.487,85.344 D6.2@102.503,85.36
D7_1: D7.1 D11.2 | length 3.2
  Top Layer w0.25: D7.1@100.861,91.439 102.34,91.44 D11.2@102.427,91.527
  Top Layer w0.254: D7.1@100.861,91.439 100.947,91.527 D11.2@102.427,91.527
D8_1: D8.1 D12.2 | length 1.6
  Top Layer w0.254: D8.1@100.861,88.137 102.376,88.138 D12.2@102.436,88.078
D9_2: D9.2 R25.2 | length 2
  Top Layer w0.254: R25.2@124.039,76.124 124.09,76.073 D9.2@126.065,76.072
D10_2: D10.2 R26.2 | length 2
  Top Layer w0.254: R26.2@123.912,78.791 123.963,78.74 D10.2@125.938,78.739
FAN-OUT: JP6.1 Q2.3 | length 6.6
  Top Layer w0.4: v2(123.782,64.027) 123.882,63.927 Q2.3@125.176,63.927
  Bottom Layer w0.4: JP6.1@119.723,61.385 121.14,61.385 123.382,63.627 v2(123.782,64.027)
FUELPUMP-OUT: JP7.1 Q3.3 | length 10.9
  Top Layer w0.4: v2(127.206,63.937) 127.217,63.927 Q3.3@128.777,63.927
  Bottom Layer w0.4: JP7.1@119.977,58.827 122.096,58.827 126.806,63.537 v2(127.206,63.937)
GND: A1.1 A1.7 AAAA1.IN- AAAA1.OUT- AAAAC3.2 AAAAC4.2 AAAAC5.1 AAAAC6.1 AAAAD5.2 AAAALED8.2 AAAAR14.1 AAAAU8.3 AAAAU8.5 AAAAU8.6 C1.1 C2.1 C3.2 C4.2 C5.2 C6.2 C7.2 C8.1 C9.2 C10.2 C11.2 C12.2 C13.2 C14.2 C15.1 C16.1 C17.1 C22.2 C23.2 C24.1 C25.1 C26.1 C27.1 C28.1 C29.2 D1.1 D2.1 D9.1 D10.1 D13.2 D20.2 IC3.6 J2.3 J4.17 J4.19 J4.23 J4.36 J6.1 J6.2 J6.3 J6.4 J6.5 Q1.2 Q2.2 Q3.2 Q4.3 Q5.3 Q6.3 Q7.3 Q8.3 Q9.3 Q10.3 Q11.3 R1.2 R2.1 R3.2 R4.1 R15.2 R16.1 R19.2 R20.1 R29.1 R49.2 R50.1 R52.2 R60.2 R61.1 SW3.1 U2.3 U4.3 U5.2 U6.8 U10.19 U10.20 U13.2 XA1.GND1 XA1.GND2 XA1.GND3 XA1.GND5 XA1.GND6 | length 203.2
  Top Layer w0.254: C2.1@124.311,106.176 C1.1@126.597,106.176 ; C17.1@156.881,76.454 159.455,76.454 v2(159.528,76.527) ; R20.1@160.564,78.867 160.564,77.563 v2(159.528,76.527) ; SW3.1@162.484,73.914 162.141,73.914 v2(159.528,76.527)
  Top Layer w0.4: 107.557,53.594 110.986,53.594 112.273,52.307 J4.36@112.316,52.307 112.908,52.307 114.16,51.054 116.066,51.054 v3(117.209,49.911)
  Top Layer w0.5: AAAA1.OUT-@144.58,141.969 144.579,138.745 AAAAC3.2@147.561,135.763 ; AAAALED8.2@152.386,126.909 152.388,130.937 AAAAC3.2@147.561,135.763 ; AAAAC5.1@160.643,126.76 163.246,126.76 AAAAR14.1@163.31,126.696 163.915,127.301 AAAAU8.6@170.295,127.301 AAAAU8.3@170.295,137.621 170.295,139.7 168.517,141.478 AAAAD5.2@166.951,141.478 166.894,141.421 AAAAU8.5@166.895,137.621 165.037,135.763 AAAAC3.2@147.561,135.763 ; AAAAC6.1@177.293,141.478 178.042,141.478 AAAAC4.2@179.946,139.573 181.808,139.573 AAAA1.IN-@184.204,141.969
  Top Layer w1: 87.364,65.575 Q6.3@89.67,65.575 ; 87.364,98.722 Q8.3@89.67,98.722 ; 87.364,109.771 Q9.3@89.67,109.771 ; 87.364,120.82 Q11.3@89.67,120.82 ; Q5.3@89.67,54.526 88.336,54.526 87.364,55.499 87.364,130.302 88.931,131.869 Q10.3@89.67,131.869 ; U10.20@145.657,98.171 U10.19@145.657,100.711 ; AAAA1.IN-@184.204,141.969 184.203,136.459 U13.2@187.82,132.842
  other v1: 96.508,40.513 97.651,40.513 98.794,40.513 99.937,40.513 101.08,40.513 102.223,40.513 96.508,41.656 97.651,41.656 98.794,41.656 99.937,41.656 101.08,41.656 102.223,41.656 96.508,42.799 97.651,42.799 98.794,42.799 99.937,42.799 101.08,42.799 102.223,42.799 96.508,43.942 97.651,43.942 98.794,43.942 99.937,43.942 101.08,43.942 102.223,43.942 96.508,45.085 97.651,45.085 98.794,45.085 99.937,45.085 101.08,45.085 102.223,45.085 96.508,46.228 97.651,46.228 98.794,46.228 99.937,46.228 101.08,46.228 102.223,46.228 77.839,137.287 78.982,137.287 80.125,137.287 81.268,137.287 82.411,137.287 83.554,137.287 77.839,138.43 78.982,138.43 80.125,138.43 81.268,138.43 82.411,138.43 83.554,138.43 77.839,139.573 78.982,139.573 80.125,139.573 81.268,139.573 82.411,139.573 83.554,139.573 77.839,140.716 78.982,140.716 80.125,140.716 81.268,140.716 82.411,140.716 83.554,140.716 77.839,141.859 78.982,141.859 80.125,141.859 81.268,141.859 82.411,141.859 83.554,141.859 77.839,143.002 78.982,143.002 80.125,143.002 81.268,143.002 82.411,143.002 83.554,143.002
  other v2: 155.276,42.227 124.057,42.385 118.377,45.327 137.876,46.227 150.176,46.527 154.576,46.727 170.776,46.727 117.877,47.127 177.276,47.127 185.016,47.211 186.286,47.211 187.556,47.211 144.377,47.427 185.016,48.227 186.286,48.227 187.556,48.227 124.194,48.26 138.777,48.527 185.016,49.243 186.286,49.243 187.556,49.243 138.777,50.627 118.377,51.927 138.077,52.827 145.077,53.427 123.476,54.227 163.776,56.027 173.276,56.327 135.487,56.609 126.785,57.481 154.277,57.727 143.476,57.927 116.066,59.944 148.476,60.927 141.476,61.727 115.577,62.527 124.224,64.924 141.577,65.427 116.077,65.977 181.976,66.927 132.476,67.027 130.026,67.785 146.155,68.293 107.293,72.865 107.293,75.151 169.377,75.927 163.183,81.788 172.327,81.788 178.666,118.585 180.444,118.585 119.377,128.477 121.677,130.877 121.277,133.777 166.231,141.478
  other v3: 117.336,42.418 110.605,44.831 111.494,44.831 112.383,44.831 121.273,46.101 130.417,46.99 125.21,48.26 130.417,49.149 171.057,49.403 171.819,49.403 172.708,49.403 130.417,49.911 121.019,50.546 130.417,51.308 130.417,52.07 130.417,53.467 130.417,54.229 128.385,56.515 128.385,57.277 146.038,59.309 162.675,59.563 163.437,59.563 146.038,60.071 162.675,60.325 173.597,60.96 146.165,64.897 173.47,65.151 174.359,65.151 175.248,65.151 169.406,67.183 170.168,67.183 170.93,67.183 148.959,67.818 145.403,67.945 152.515,67.945 148.959,68.58 123.432,73.406 124.194,73.406 124.956,73.406 125.718,73.406 126.48,73.406 127.242,73.406 138.672,73.914 139.434,73.914 140.196,73.914 145.53,74.93 145.53,75.692 128.165,76.073 133.465,78.105 128.038,78.74 129.528,78.867 161.786,79.121 162.548,79.121 163.31,79.121 164.072,79.121 129.528,79.502 142.101,79.629 129.528,80.137 142.101,80.391 129.528,80.772 128.038,81.026 131.306,81.153 142.101,81.153 100.572,81.407 152.642,81.534 153.404,81.534 154.166,81.534 154.928,81.534 146.673,81.661 147.435,81.661 148.197,81.661 161.405,81.788 162.167,81.788 101.207,82.042 128.893,85.217 129.147,88.011 172.835,88.265 173.597,88.265 174.359,88.265 174.359,89.027 129.655,89.535 174.359,89.789 107.684,89.916 116.447,93.726 116.447,94.488 129.401,94.488 129.401,95.25 129.401,96.012 133.592,102.616 133.338,107.696 133.465,108.458 133.465,109.22 133.719,113.03 133.719,113.792 133.719,114.554 113.526,125.73 114.415,125.73 116.574,125.857 115.177,128.524 115.05,130.429 115.05,132.588 107.43,133.223 108.319,134.239 109.462,135.255 189.599,143.891
HC1: 
  other v1: 68.792,115.367 69.935,115.367 75.777,115.367 76.92,115.367 78.063,115.367 79.206,115.367 80.349,115.367 81.492,115.367 68.792,116.51 69.935,116.51 75.777,116.51 76.92,116.51 78.063,116.51 79.206,116.51 80.349,116.51 81.492,116.51 68.792,117.653 69.935,117.653 75.777,117.653 76.92,117.653 78.063,117.653 79.206,117.653 80.349,117.653 81.492,117.653 68.792,118.796 69.935,118.796 75.777,118.796 76.92,118.796 78.063,118.796 79.206,118.796 80.349,118.796 81.492,118.796 68.792,119.939 69.935,119.939 75.777,119.939 76.92,119.939 78.063,119.939 79.206,119.939 80.349,119.939 81.492,119.939 68.792,121.082 69.935,121.082 75.777,121.082 76.92,121.082 78.063,121.082 79.206,121.082 80.349,121.082 81.492,121.082
HC2: 
  other v1: 68.755,93.614 69.898,93.614 75.74,93.614 76.883,93.614 78.026,93.614 79.169,93.614 80.312,93.614 81.455,93.614 68.755,94.757 69.898,94.757 75.74,94.757 76.883,94.757 78.026,94.757 79.169,94.757 80.312,94.757 81.455,94.757 68.755,95.9 69.898,95.9 75.74,95.9 76.883,95.9 78.026,95.9 79.169,95.9 80.312,95.9 81.455,95.9 68.755,97.043 69.898,97.043 75.74,97.043 76.883,97.043 78.026,97.043 79.169,97.043 80.312,97.043 81.455,97.043 68.755,98.186 69.898,98.186 75.74,98.186 76.883,98.186 78.026,98.186 79.169,98.186 80.312,98.186 81.455,98.186 68.755,99.329 69.898,99.329 75.74,99.329 76.883,99.329 78.026,99.329 79.169,99.329 80.312,99.329 81.455,99.329
HC-1-OUT: D18.2 J4.10 Q11.2 | length 64
  Top Layer w0.254: J4.10@112.316,85.327 115.761,85.326 D18.2@117.286,86.868
  Bottom Layer w1: Q11.2@89.67,118.28 92.781,118.28 105.144,105.918 113.78,105.918 120.13,99.568 120.13,88.519 116.937,85.326 J4.10@112.316,85.327
HC-2-OUT: D16.2 J4.6 Q8.2 | length 46.8
  Top Layer w0.254: J4.6@112.316,90.407 114.524,90.406 115.685,91.567 121.303,91.567 122.436,90.274 D16.2@122.415,89.945
  Bottom Layer w1: Q8.2@89.67,96.182 93.927,96.2 95.644,97.917 114.161,97.917 115.177,96.901 115.177,91.694 113.889,90.406 J4.6@112.316,90.407
IAT_SENSOR: C10.1 J4.39 R35.1 R39.2 | length 19.9
  Top Layer w0.25: J4.39@109.776,47.227 110.965,48.415 112.888,48.415 115.225,46.078 119.627,46.078 120.919,47.371 122.289,47.371 122.987,46.672 123.686,47.371 125.591,47.371 126.482,46.479 R39.2@126.483,46.279
IC3_2: IC3.2 JP2.1 | length 19.7
  Top Layer w0.25: JP2.1@160.176,61.827 162.576,61.827 165.202,59.202 165.202,57.735 170.085,52.852 173.691,52.852 174.016,52.527 IC3.2@174.816,51.727
IC3_3: IC3.3 JP3.1 | length 20.6
  Top Layer w0.25: JP3.1@160.175,51.826 163.942,51.826 164.953,50.818 164.953,49.157 165.342,48.768 174.397,48.768 IC3.3@177.356,51.727
IDEL: 
  other v1: 68.773,104.409 69.916,104.409 75.758,104.409 76.901,104.409 78.044,104.409 79.187,104.409 80.33,104.409 81.473,104.409 68.773,105.552 69.916,105.552 75.758,105.552 76.901,105.552 78.044,105.552 79.187,105.552 80.33,105.552 81.473,105.552 68.773,106.695 69.916,106.695 75.758,106.695 76.901,106.695 78.044,106.695 79.187,106.695 80.33,106.695 81.473,106.695 68.773,107.838 69.916,107.838 75.758,107.838 76.901,107.838 78.044,107.838 79.187,107.838 80.33,107.838 81.473,107.838 68.773,108.981 69.916,108.981 75.758,108.981 76.901,108.981 78.044,108.981 79.187,108.981 80.33,108.981 81.473,108.981 68.773,110.124 69.916,110.124 75.758,110.124 76.901,110.124 78.044,110.124 79.187,110.124 80.33,110.124 81.473,110.124
IDLE-OUT: D19.2 J4.8 Q9.2 | length 51.9
  Top Layer w0.254: J4.8@112.316,87.867 115.161,87.848 D19.2@117.286,89.945
  Bottom Layer w1: Q9.2@89.67,107.231 95.321,107.231 99.81,102.743 113.526,102.743 117.844,98.425 117.844,91.059 114.651,87.866 J4.8@112.316,87.867
IGN-1-OUT: J4.13 R14.1 | length 8.7
  Top Layer w0.4: J4.13@109.776,80.247 111.04,81.511 115.148,81.511 R14.1@117.164,83.527
IGN-2-OUT: J4.14 R13.1 | length 5.3
  Top Layer w0.4: J4.14@112.316,80.247 116.491,80.247 R13.1@117.321,81.077
IGN-3-OUT: J4.16 R28.1 | length 5.1
  Top Layer w0.4: J4.16@112.316,77.707 116.494,77.707 R28.1@117.164,78.377
IGN-4-OUT: J4.15 R27.1 | length 8
  Top Layer w0.4: J4.15@109.776,77.707 111.04,76.443 116.685,76.443 R27.1@117.102,76.027
INJ1: 
  other v1: 68.719,82.384 69.862,82.384 75.704,82.384 76.847,82.384 77.99,82.384 79.133,82.384 80.276,82.384 81.419,82.384 68.719,83.527 69.862,83.527 75.704,83.527 76.847,83.527 77.99,83.527 79.133,83.527 80.276,83.527 81.419,83.527 68.719,84.67 69.862,84.67 75.704,84.67 76.847,84.67 77.99,84.67 79.133,84.67 80.276,84.67 81.419,84.67 68.719,85.813 69.862,85.813 75.704,85.813 76.847,85.813 77.99,85.813 79.133,85.813 80.276,85.813 81.419,85.813 68.719,86.956 69.862,86.956 75.704,86.956 76.847,86.956 77.99,86.956 79.133,86.956 80.276,86.956 81.419,86.956 68.719,88.099 69.862,88.099 75.704,88.099 76.847,88.099 77.99,88.099 79.133,88.099 80.276,88.099 81.419,88.099